# Altium PCB PCB1.PcbDoc
Units mil, origin at the board's own origin, x right, y up, seen from the top; angles counter-clockwise.
Board outline 6000 x 4000 mil, 2 copper layers (Top Layer, Bottom Layer); 3 components, 5 nets, 43 pads, 0 vias.
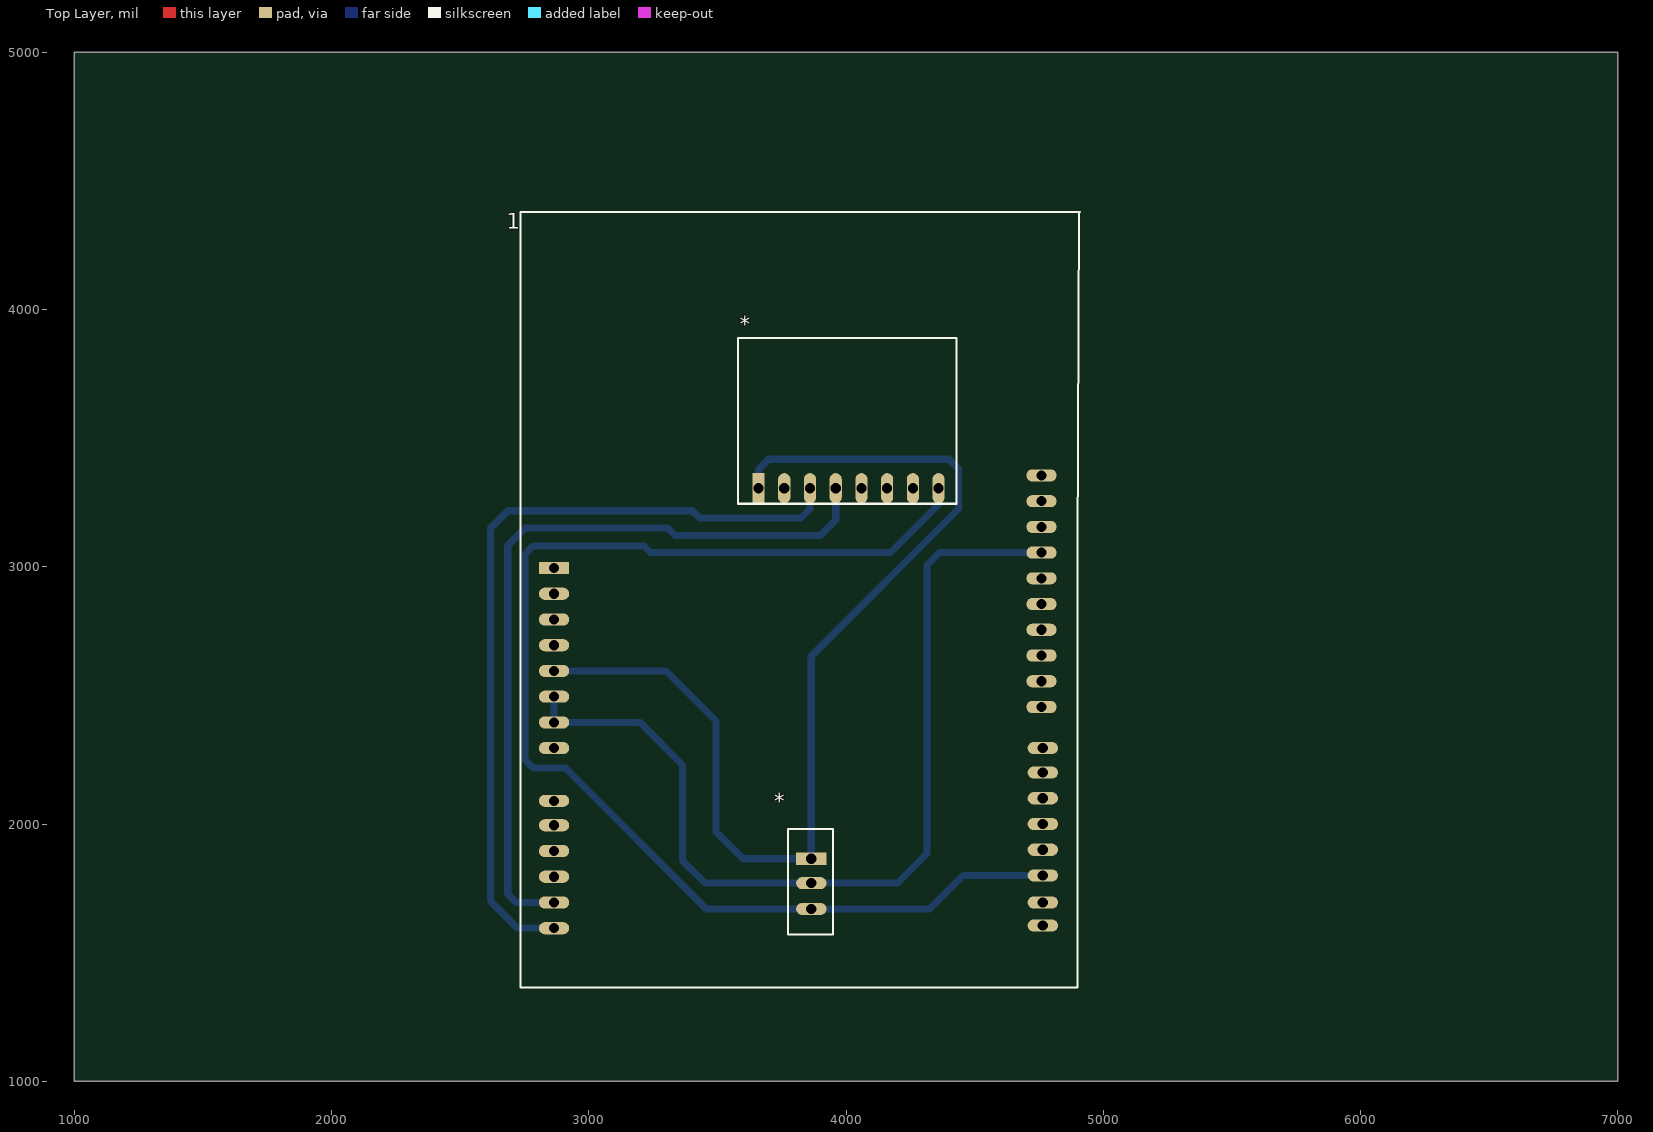
[diagram p0: Top Layer view]
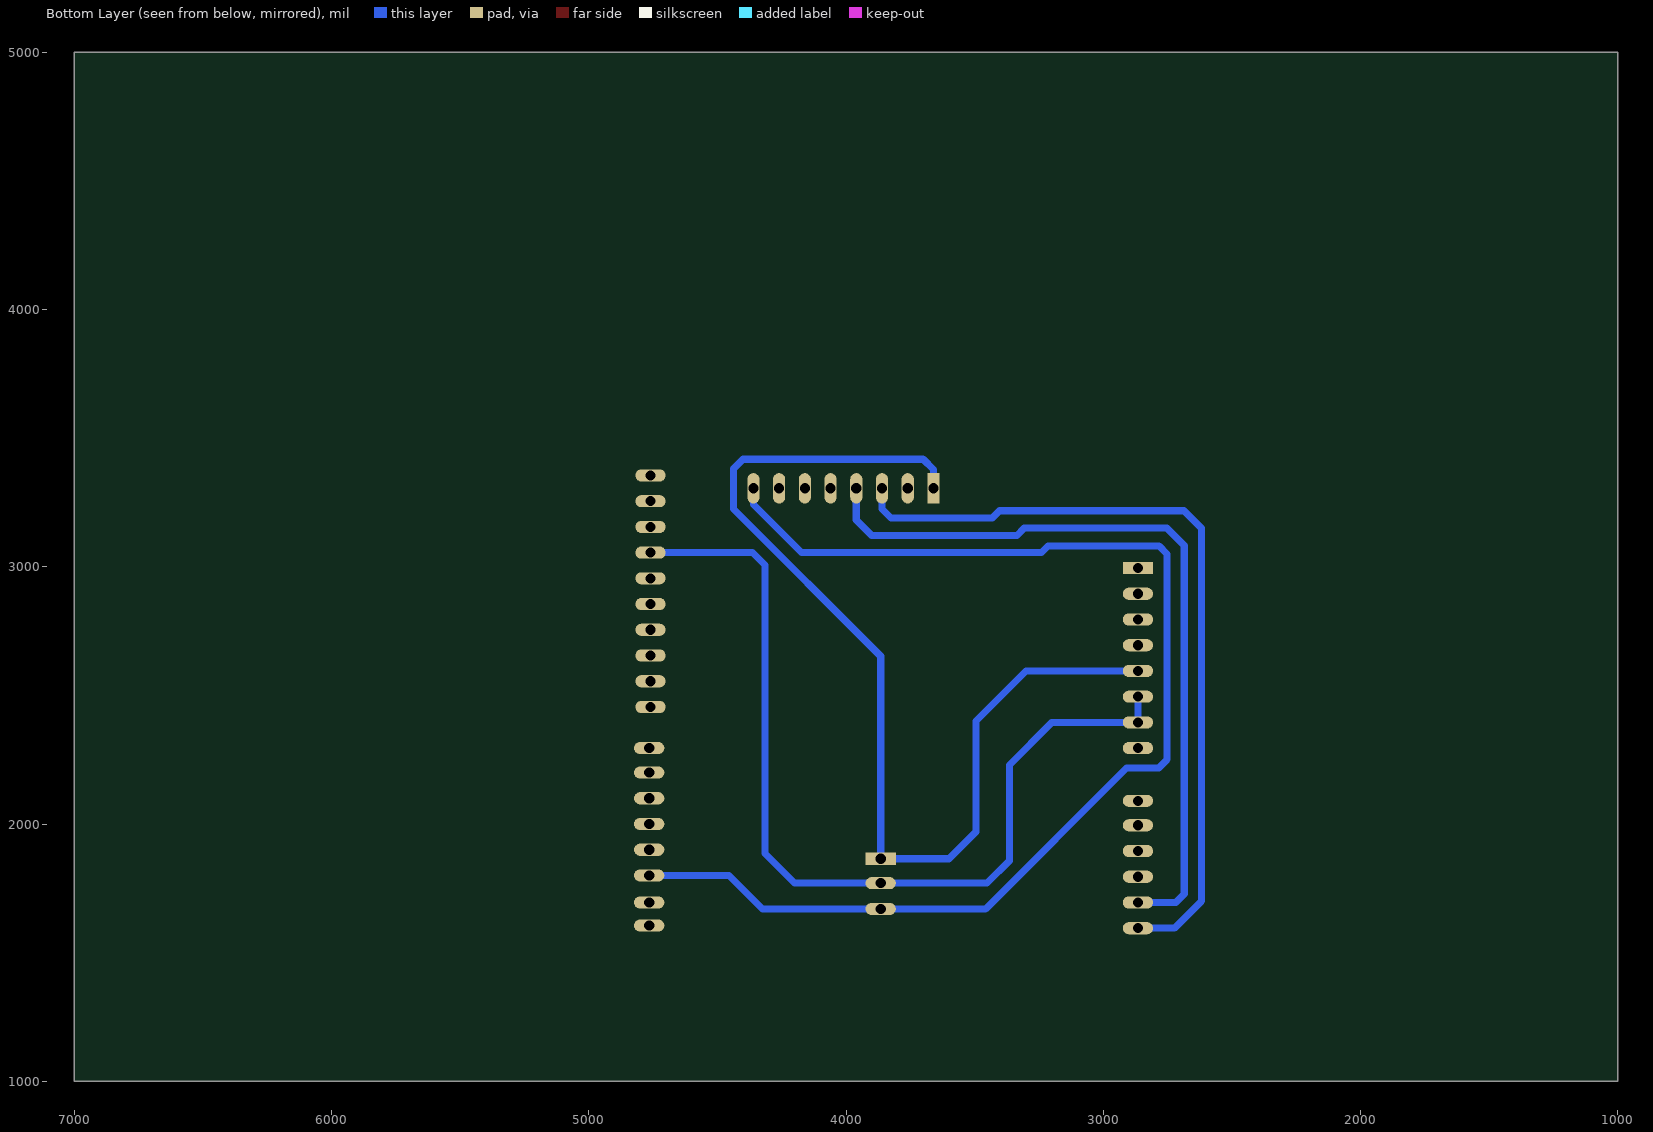
[diagram p1: Bottom Layer view, seen from below]
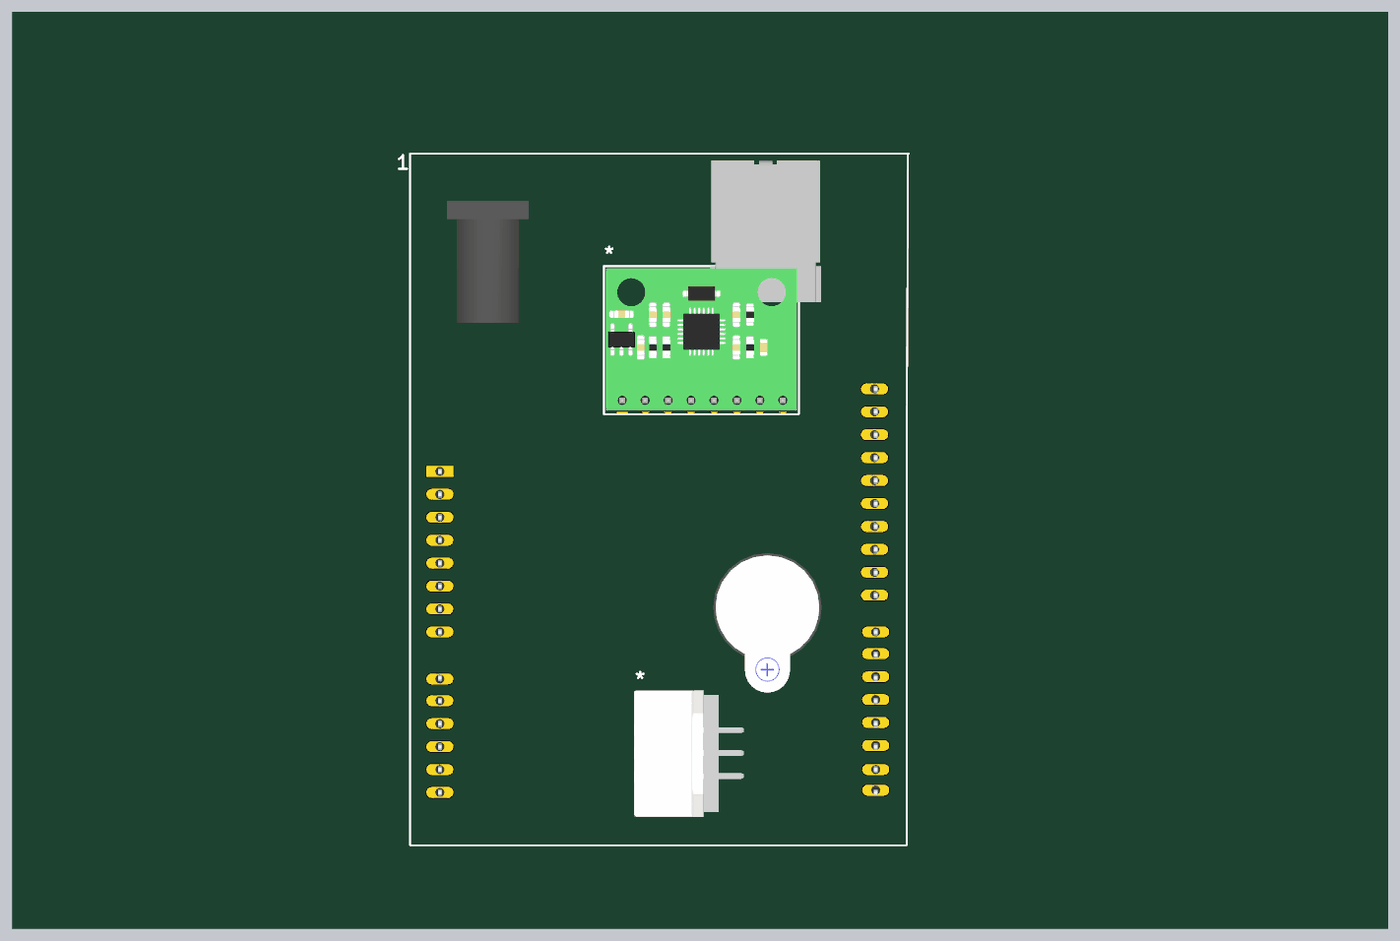
[diagram p2: 3D render of the assembled board from above, using the file's embedded part models]

## Layer stack, top to bottom
Top Solder: solder mask 0.4, Solder Resist, Dk 3.5
Top Layer: signal copper 1.4
Dielectric 1: dielectric 12.6, FR-4, Dk 4.8
Bottom Layer: signal copper 1.4
Bottom Solder: solder mask 0.4, Solder Resist, Dk 3.5

## Board outline
1000,1000 7000,1000 7000,5000 1000,5000

## Design rules (kind name [scope] priority, off if disabled: settings)
Clearance [All] p1: gap=39.37 ignorepadtopadclearanceinfootprint=FALSE
PolygonConnect [All] p1: connectstyle=Direct reliefconductorwidth=10 reliefentries=4 polygonreliefangle="90 Angle" airgapwidth=10
RoomDefinition Sheet1 [InComponentClass('Sheet1')] p1: confinementstyle=ConfineIn formatcopy=TRUE lockcomponents=FALSE outline 2065,1355 5625,1355 5625,4390 2065,4390
RoutingLayers [All] p1: top layer_v5=FALSE bottom layer_v5=TRUE
RoutingVias [All] p1: holewidth=28 width=50 viastyle="Through Hole" minholewidth=28 minwidth=50 maxholewidth=28 maxwidth=50
SolderMaskExpansion [All] p1: expansion=4 istentingtop=FALSE
Width [All] p1: maxlimit=10 minlimit=10 preferedwidth=27.56
29 further rules are at their usual default settings.

## Classes and differential pairs
component class Sheet1: 1 *

## Components (designator, comment, footprint, x,y, rotation, side; value= is the part's Value field where it differs from the comment)
1 "1" "Arduino ieee" 3550,3000 r0 top
* "DHT" "DHT - duplicate" 2875,1195 r90 top
* "MPU?" MPU 3715,3710 r0 top

## Footprints (in the part's own frame and the unit in brackets; to place one, negate y for a bottom-side part, rotate by r counter-clockwise, add the part's x,y. Pads: shape width x height; smd on the part's side, far side on the other; paste and mask are expansions set on the pad)
"Arduino ieee" [mm]
  rect 3x1.2 hole 1: 1(-17.399,-0.127)
  oval 3x1.2 hole 1: 2(-17.399,-2.667) 3(-17.399,-5.207) 4(-17.399,-7.747) 5(-17.399,-10.287) 6(-17.399,-12.827) 7(-17.399,-15.367) 8(-17.399,-17.907) 9(-17.399,-23.114) 10(-17.399,-25.527) 11(-17.399,-28.067) 12(-17.399,-30.607) 13(-17.399,-33.147) 14(-17.399,-35.687) 15(30.861,-33.147) 16(30.861,-35.433) 17(30.861,-30.48) 18(30.861,-27.94) 19(30.861,-25.4) 20(30.861,-22.86) 21(30.861,-20.32) 22(30.861,-17.907) 23(30.734,-13.843) 24(30.734,-11.303) 25(30.734,-8.763) 26(30.734,-6.223) 27(30.734,-3.683) 28(30.734,-1.143) 29(30.734,1.397) 30(30.734,3.937) 31(30.734,6.477) 32(30.734,9.017)
  silkscreen extent -20.7,-41.53 34.54,35.05, body extent -20.07,-40.91 33.53,34.3, height 2.49
"DHT - duplicate" [mm]
  rect 1.2x3 hole 1 unplated: 1(17.018,-25.146)
  oval 1.2x3 hole 1: 2(12.065,-25.146) 3(14.605,-25.146)
  silkscreen extent 9.53,-27.3 19.94,-22.86, body extent 7.46,-33.37 21.46,-21.24, height 43.67
MPU [mm]
  rect 1.2x3 hole 1: 1(-1.397,-10.287)
  oval 1.2x3 hole 1: 2(1.143,-10.287) 3(3.683,-10.287) 4(6.223,-10.287) 5(8.763,-10.287) 6(11.303,-10.287) 7(13.843,-10.287) 8(16.383,-10.287)
  silkscreen extent -3.43,-11.81 18.16,4.57, body extent -3.17,-11.56 17.93,4.32, height 10.36

## Part data
1: library part ARDUINO?, Parameter 1=ARDUINO
*: Parameter 1=DHT
*: Parameter 1=mpu

## Nets (pads, with @x,y where several pads share a name; then routed paths per layer and width w, separated by ;. In a path a pad name is that pad's centre, name@x,y a point inside that pad or via, vN(x,y) a via of type N, cw(c..) or ccw(c..) an arc to the next point about the centre after c; other vN are vias at no path point)
GND: 1.6 1.7 1.29 *.3@3865,1770 | length 3661.9
  Bottom Layer w27.56: 1.6 1.7 3200,2395 3365,2230 3365,1857 3452,1770 3865,1770 4200,1770 4315,1885 4315,3007 4363,3055 1.29
int: 1.17 *.2@3865,1670 *.8 | length 4878.8
  Bottom Layer w27.56: *.8 4360,3241.73 4173.41,3055.14 3240.14,3055.14 3214.73,3080.55 2782.55,3080.55 2752,3050 2752,2250 2784,2218 2909,2218 3457,1670 3865,1670 4325,1670 4455,1800 1.17
scl: 1.14 *.3@3860,3305 | length 3117.6
  Bottom Layer w27.56: 1.14 2723.14,1595 2618.14,1700 2618.14,3150 2685.78,3217.64 3402.64,3217.64 3431.28,3189 3825,3189 3860,3224 *.3@3860,3305
SDA: 1.13 *.4 | length 3011
  Bottom Layer w27.56: 1.13 2718,1695 2685.07,1727.93 2685.07,3082.55 2753.23,3150.71 3307,3150.71 3335.64,3122.07 3900,3122.07 3960,3182.07 *.4
"vcc mpu": 1.5 *.1 | length 4189.1
  Bottom Layer w27.56: 1.5 3300,2595 3495,2400 3495,1970 3600,1865 3865,1865 3865,2652.08 4437,3224.08 4437,3381 4400,3418 3700,3418 3660,3378 *.1@3660,3305
pads on no net: 1.1 1.2 1.3 1.4 1.8 1.9 1.10 1.11 1.12 1.15 1.16 1.18 1.19 1.20 1.21 1.22 1.23 1.24 1.25 1.26 1.27 1.28 1.30 1.31 1.32 *.2@3760,3305 *.5 *.6 *.7